# Altium PCB PCB1.PcbDoc
Units mil, origin at the board's own origin, x right, y up, seen from the top; angles counter-clockwise.
Board outline 6000 x 4000 mil, 2 copper layers (Top Layer, Bottom Layer); 7 components, 18 nets, 78 pads, 0 vias.
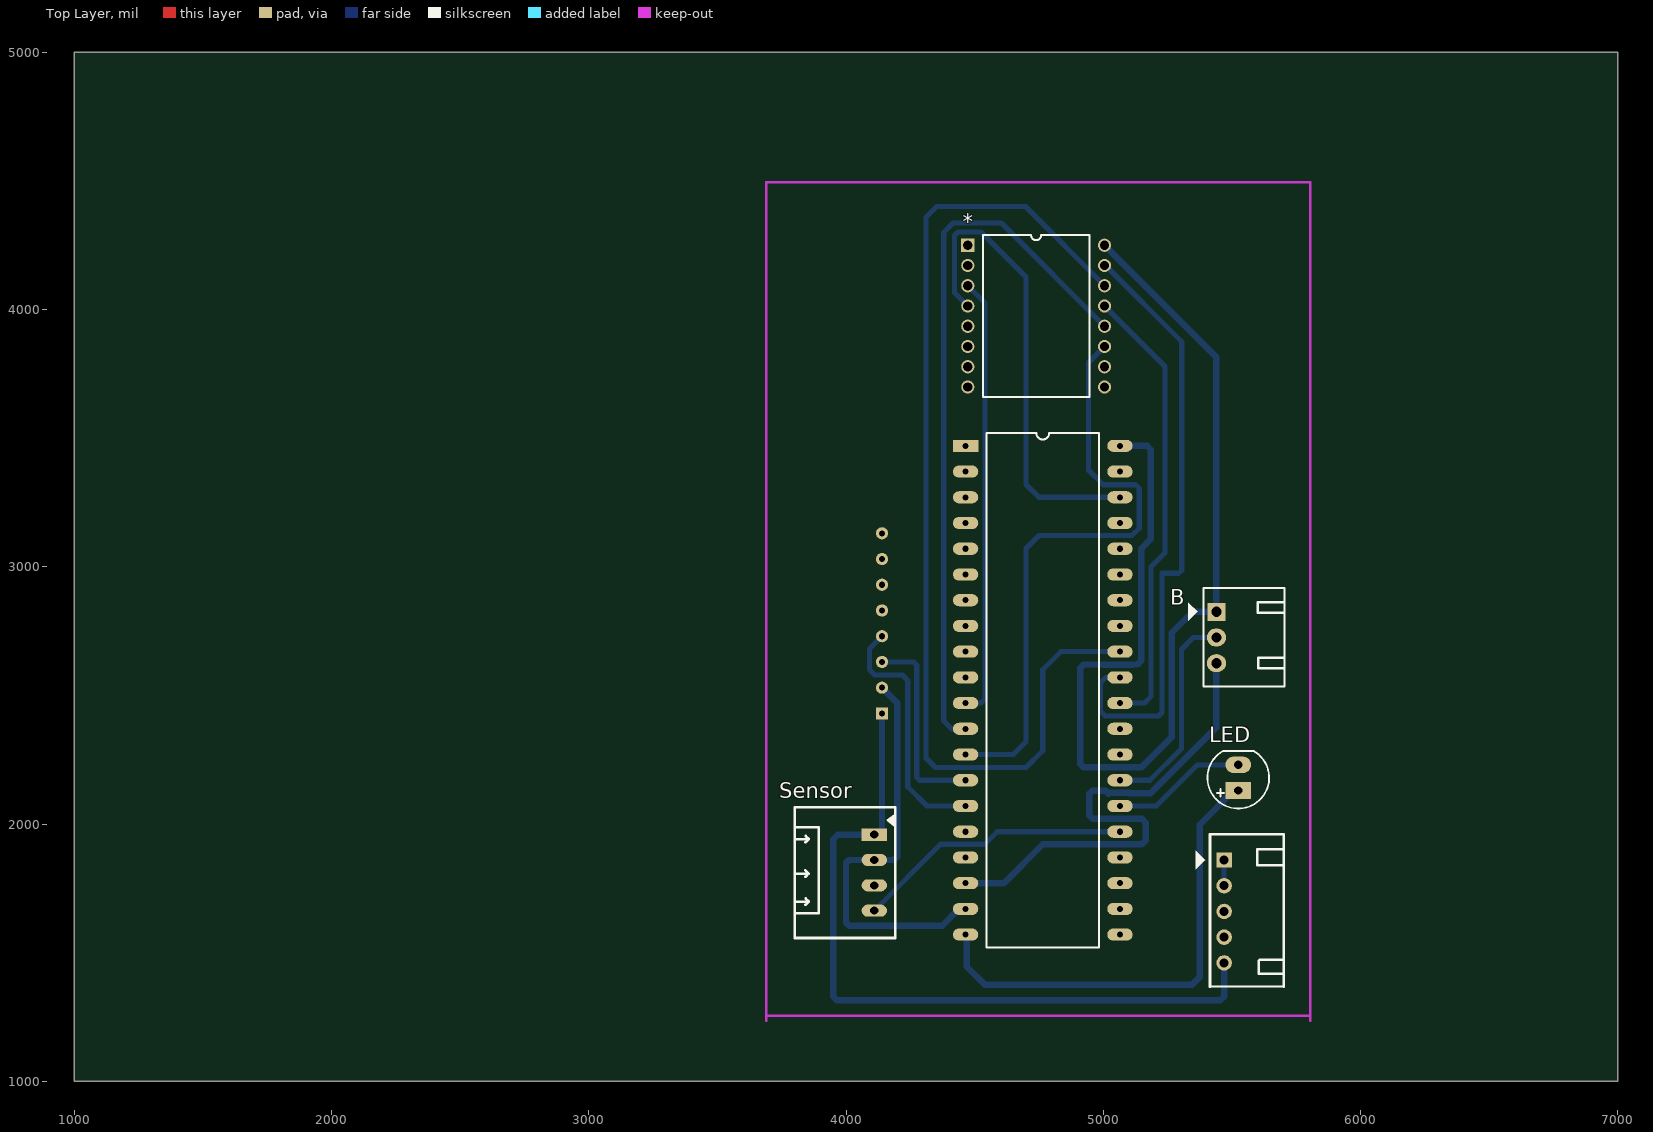
[diagram p0: Top Layer view]
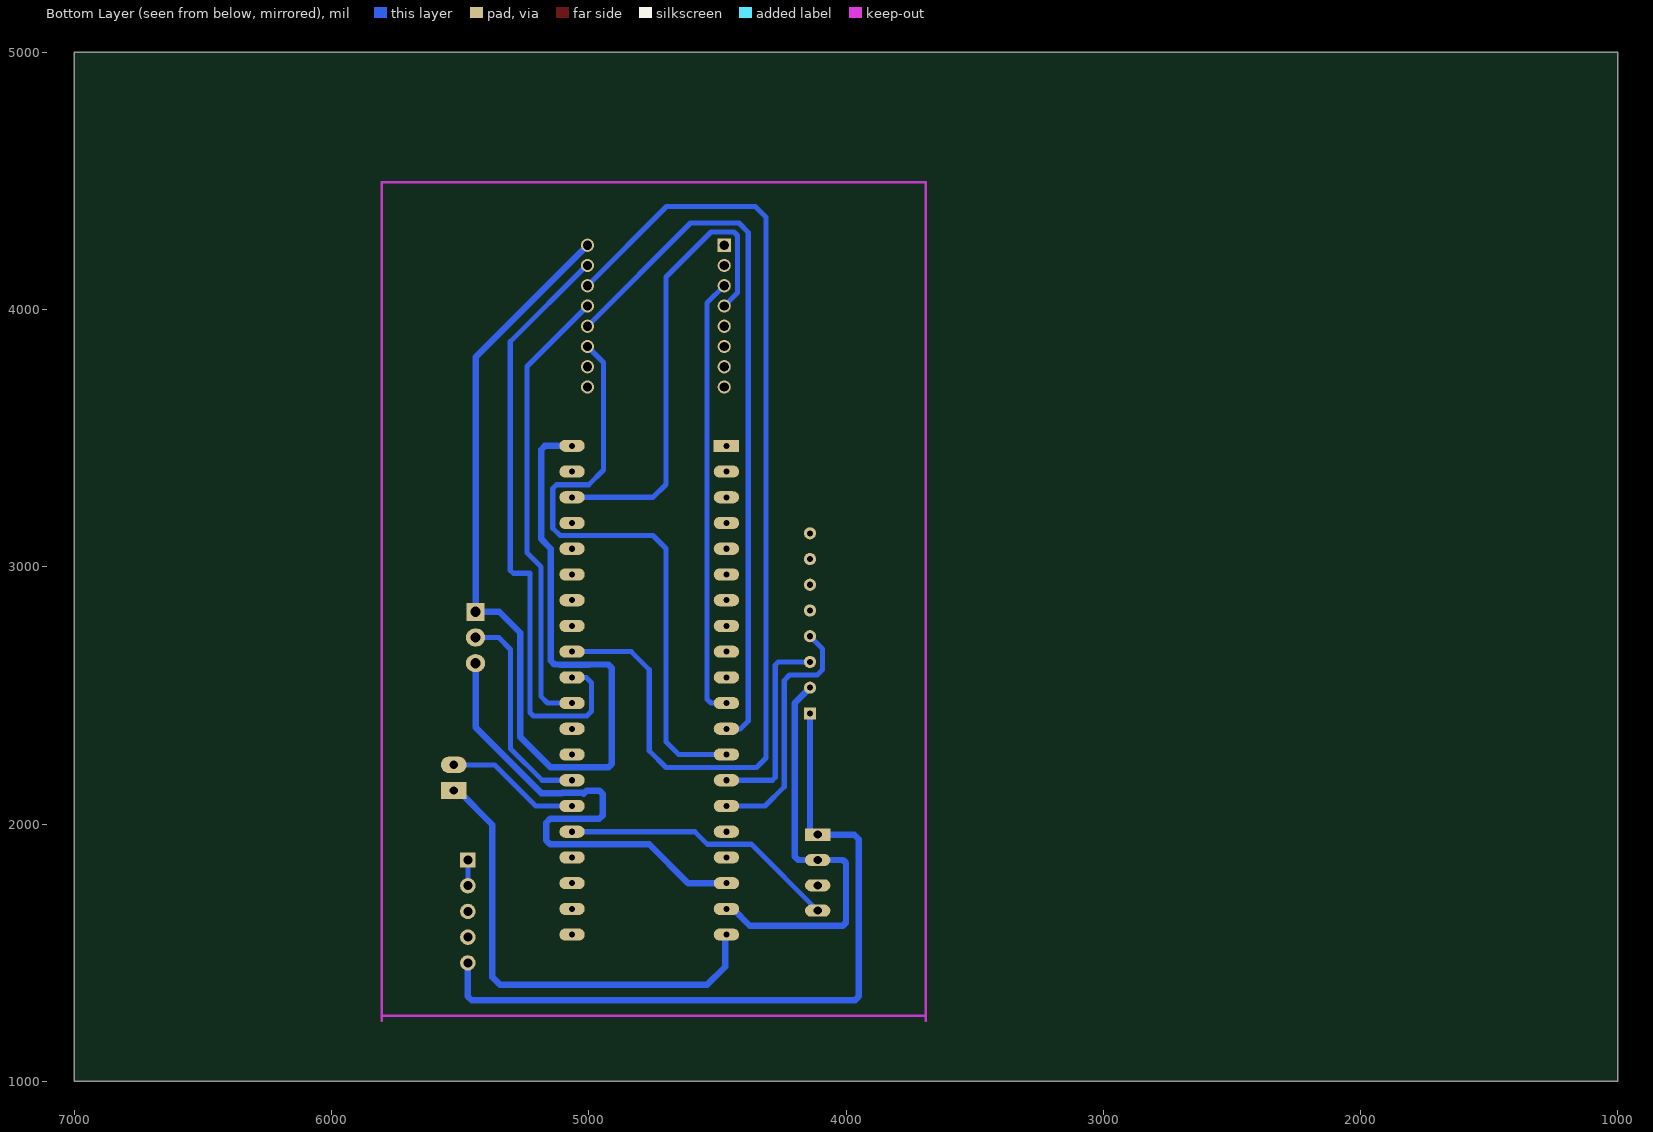
[diagram p1: Bottom Layer view, seen from below]
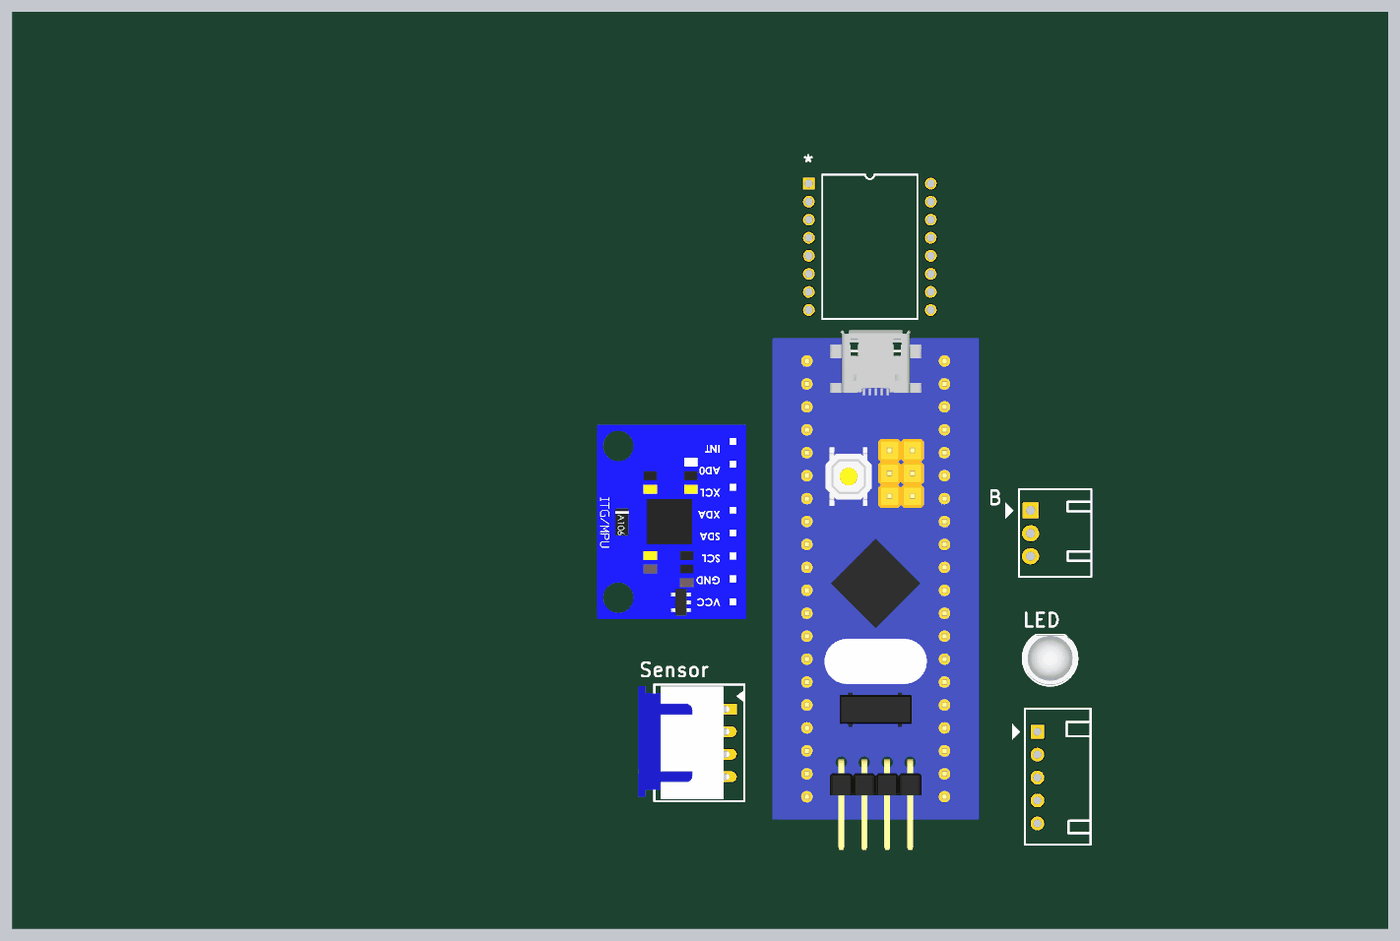
[diagram p2: 3D render of the assembled board from above, using the file's embedded part models]

## Layer stack, top to bottom
Top Solder: solder mask 0.4, Solder Resist, Dk 3.5
Top Layer: signal copper 1.4
Dielectric 1: dielectric 12.6, FR-4, Dk 4.8
Bottom Layer: signal copper 1.4
Bottom Solder: solder mask 0.4, Solder Resist, Dk 3.5

## Board outline
1000,1000 7000,1000 7000,5000 1000,5000

## Design rules (kind name [scope] priority, off if disabled: settings)
Clearance [All] p1: gap=15 ignorepadtopadclearanceinfootprint=FALSE
PolygonConnect [All] p1: connectstyle=Relief reliefconductorwidth=10 reliefentries=4 polygonreliefangle="90 Angle" airgapwidth=10
RoutingLayers [All] p1: top layer_v5=FALSE bottom layer_v5=TRUE
RoutingVias [All] p1: holewidth=28 width=35 viastyle="Through Hole" minholewidth=28 minwidth=30 maxholewidth=28 maxwidth=50
SolderMaskExpansion [All] p1: expansion=4 istentingtop=FALSE
Width [All] p1: maxlimit=50 minlimit=10 preferedwidth=20 toplayer_prefwidth=10 minimp=50.000000 maximp=50.000000 favimp=50.000000
29 further rules are at their usual default settings.

## Components (designator, comment, footprint, x,y, rotation, side; value= is the part's Value field where it differs from the comment)
* "Component_1" "DIP16 - duplicate" 4473.5,4249.96 r0 top
B "Buzzer" "Header 3P DC 2.54" 5440,2825 r0 top
LED "LED 5mm" LED-5MM-RED 5525,2130 r90 top
Sensor "MQ-2" CON4_100_S4B-XH-A_TH_RA 4110,1810.79 r0 top
? "MOD MPU_6050" "MOD MPU-6050" 4140,2430 r90 top
? "KIT STM32F103C8T6" "STM32F103 KIT" 4465,3470 r0 top
? "Header 5P 2.54 Duc Cong" "Header 5P DC 2.54" 5470,1860 r0 top

## Footprints (in the part's own frame and the unit in brackets; to place one, negate y for a bottom-side part, rotate by r counter-clockwise, add the part's x,y. Pads: shape width x height; smd on the part's side, far side on the other; paste and mask are expansions set on the pad)
CON4_100_S4B-XH-A_TH_RA [mm] "Connector Header"
  rect 2.5x1.2 hole 0.8: 1(0,3.75)
  oval 2.5x1.2 hole 0.8: 2(0,1.25) 3(0,-1.25) 4(0,-3.75)
  silkscreen extent -7.87,-6.45 2.08,6.48, body extent -9.64,-6.25 0.44,6.31, height 5.91
"DIP16 - duplicate" [mm]
  rect 1.3x1.3 hole 0.9: 1(0,0)
  round 1.3 hole 0.9: 2(0,-2) 3(0,-4) 4(0,-6) 5(0,-8) 6(0,-10) 7(0,-12) 8(0,-14) 9(13.5,-14) 10(13.5,-12) 11(13.5,-10) 12(13.5,-8) 13(13.5,-6) 14(13.5,-4) 15(13.5,-2) 16(13.5,0)
  silkscreen extent 1.48,-15 12.02,1
"Header 3P DC 2.54" [mil]
  rect 70x70 hole 39.37 unplated: 1(0,0)
  oval 75x70 hole 39.37 unplated: 2(0,-100) 3(0,-200)
  silkscreen extent -110,-290 265,93
"Header 5P DC 2.54" [mil]
  rect 60x60 hole 35: 1(0,0)
  round 60 hole 35: 2(0,-100) 3(0,-200) 4(0,-300) 5(0,-400)
  silkscreen extent -110,-492 232,100
LED-5MM-RED [mil] "LED 2 PIN, 5 ly , Only colour,pin to pin 100mil"
  rect 65x100 hole 32: 1(0,0)
  oval 65x100 hole 32: 2(100,0)
  silkscreen extent -70,-120 154,120, body extent -65,-119 149,118, height 339
"MOD MPU-6050" [mm]
  rect 1.2x1.2 hole 0.6: 0(0,0)
  round 1.2 hole 0.6: 1(2.54,0) 2(5.08,0) 3(7.62,0) 4(10.16,0) 5(12.7,0) 6(15.24,0) 7(17.78,0)
  body extent -1.99,-1.52 19.51,14.98, height 11.03
"STM32F103 KIT" [mm]
  rect 2.5x1.2 hole 0.6: 1(0,0)
  oval 2.5x1.2 hole 0.6: 2(0,-2.54) 3(0,-5.08) 4(0,-7.62) 5(0,-10.16) 6(0,-12.7) 7(0,-15.24) 8(0,-17.78) 9(0,-20.32) 10(0,-22.86) 11(0,-25.4) 12(0,-27.94) 13(0,-30.48) 14(0,-33.02) 15(0,-35.56) 16(0,-38.1) 17(0,-40.64) 18(0,-43.18) 19(0,-45.72) 20(0,-48.26) 21(15.24,-48.26) 22(15.24,-45.72) 23(15.24,-43.18) 24(15.24,-40.64) 25(15.24,-38.1) 26(15.24,-35.56) 27(15.24,-33.02) 28(15.24,-30.48) 29(15.24,-27.94) 30(15.24,-25.4) 31(15.24,-22.86) 32(15.24,-20.32) 33(15.24,-17.78) 34(15.24,-15.24) 35(15.24,-12.7) 36(15.24,-10.16) 37(15.24,-7.62) 38(15.24,-5.08) 39(15.24,-2.54) 40(15.24,0)
  silkscreen extent 2.08,-49.53 13.16,1.27, body extent -3.81,-53.97 19.05,3.59, height 16.12

## Part data
B: library part "Header 3P 2.54 Duc Cong", "Cắm", Chung_Loai=Cắm, Don_Vi=Con, Ma_Hang=MH001302, Ten_Linh_Kien="Header 3P XH2.54-3P Đực Cong"
LED: library part "LED 5mm Do", "Cắm", Chung_Loai=Cắm, Don_Vi=Con, Ma_Hang=MH008967, Ten_Linh_Kien="Led 5MM Phủ Đỏ (1000c)"
Sensor: library part CON-PLG_4X1-100-RA-TH, "4 Pins, 1 Row 2.54mm Pitch, right angle Connector, male", Alternate Part Number-1=NA, Case/Package=TH-CON, Crimp Part Number=ASXHSXH22K51, Manufacturer="Wurth Electronics", Manufacturer Part Number=S4B-XH-A-1(LF)(SN), Mating Part Number=XHP-4, Supplier Part Number-1=S4B-XH-A, Supplier-1=LCSC
?: library part "STM32f103 Bluepill", "KIT STM32F103C8T6 Bluepill"
?: "Cắm", Chung_Loai=Cắm, Don_Vi=Con, Ma_Hang=MH001308, Ten_Linh_Kien="Header 5P XH2.54-5P Đực Cong"

## Nets (pads, with @x,y where several pads share a name; then routed paths per layer and width w, separated by ;. In a path a pad name is that pad's centre, name@x,y a point inside that pad or via, vN(x,y) a via of type N, cw(c..) or ccw(c..) an arc to the next point about the centre after c; other vN are vias at no path point)
GND: ?.1@4140,2530 ?.19 Sensor.2 | length 1619.3
  Bottom Layer w20: 4185,1860 4189,1864 ; ?.19@4439.41,1670 ?.19
  Bottom Layer w25: ?.1@4140,2530 4200,2470 4200,1875 4189,1864 ; 4185,1860 Sensor.2 4011.72,1860 4000,1848.28 4000,1616.72 4011.72,1605 4374.41,1605 ?.19@4439.41,1670
Net*_3: *.3 ?.11 | length 1716.2
  Bottom Layer w20: ?.11 4525,2470 4540,2485 4540,4025.98 *.3
Net*_4: *.4 ?.38 | length 1842.9
  Bottom Layer w20: *.4 4422,4065.24 4422,4287.5 4435.5,4301 4525,4301 4700,4126 4700,3320 4750,3270 ?.38
Net*_11: *.11 ?.13 | length 2366.2
  Bottom Layer w20: ?.13 4650,2270 4700,2320 4700,3071 4750,3121 5111,3121 5140,3150 5140,3304 5125,3319 5000,3319 4943,3376 4943,3794.26 *.11
Net*_12: *.12 ?.12 | length 2803.4
  Bottom Layer w20: ?.12 4410,2370 4380,2400 4380,4300 4416,4336 4604,4336 *.12
Net*_13: *.13 ?.30 | length 1769.2
  Bottom Layer w20: *.13 5240,3778.74 5240,3054.5 5185,2999.5 5185,2495 5160,2470 ?.30
Net*_14: *.14 ?.32 | length 4079.6
  Bottom Layer w20: *.14 4697.48,4400 4353,4400 4311.5,4358.5 4311.5,2256.5 4348,2220 4700,2220 4765,2285 4765,2600 4835,2670 ?.32
Net*_15: *.15 ?.31 | length 2381.3
  Bottom Layer w20: *.15 5008.78,4171.22 5305,3875 5305,2986.72 5293.28,2975 5228,2975 5228,2433 5215,2420 5007.5,2420 4990,2437.5 4990,2550 5010,2570 ?.31
Net*_16: *.16 ?.40 B.1 | length 4212.8
  Bottom Layer w25: *.16 5440,3814.96 B.1 5347.5,2825 5266.25,2743.75 5266.25,2338.25 5148,2220 4924.64,2220 4910,2234.64 4910,2605.36 4924.64,2620 4998,2620 4999,2619 5111.89,2619 5112.89,2620 5132.86,2620 5147.5,2634.64 5147.5,3070.5 5185,3108 5185,3455.36 5170.36,3470 ?.40
Net_0: ?.0 ?.5@5470,1460 Sensor.1 | length 2934.3
  Bottom Layer w20: Sensor.1 4126.38,1958.43 Sensor.1@4140,1972.05
  Bottom Layer w25: Sensor.1 3968.07,1958.43 3950,1940.36 3950,1329.64 3964.64,1315 5455.36,1315 5470,1329.64 ?.5@5470,1460 ; Sensor.1@4140,1972.05 ?.0
Net_1: ?.1@5470,1860 ?.2@5470,1760 | length 100
  Bottom Layer w20: ?.2@5470,1760 ?.1@5470,1860
Net_2: ?.2@4140,2630 ?.14 | length 771.3
  Bottom Layer w20: ?.2@4140,2630 4263.28,2630 4275,2618.28 4275,2181.72 4286.72,2170 ?.14
Net_3: ?.3@4140,2730 ?.15 | length 985.9
  Bottom Layer w20: ?.3@4140,2730 4091,2681 4091,2600 4112,2579 4219.28,2579 4240,2558.28 4240,2145 4315,2070 ?.15
Net_18: ?.18 B.3 | length 2012.2
  Bottom Layer w20: 5103.07,2121.38 5105.57,2118.88
  Bottom Layer w25: ?.18 4614,1770 4765.38,1921.38 5150.36,1921.38 5165,1936.02 5165,2005.36 5150.36,2020 4959.64,2020 4945,2034.64 4945,2115.36 4959.64,2130 5007.11,2130 5017.11,2120 ; 5018.88,2118.23 5022.03,2121.38 5103.07,2121.38 ; 5105.57,2118.88 5106.69,2120 5184,2120 5440,2376 B.3
Net_20: ?.20 LED.1 | length 1880.9
  Bottom Layer w20: ?.20 ?.20@4470,1575
  Bottom Layer w25: ?.20@4470,1575 4470,1445 4540,1375 5345,1375 5375,1405 5375,1997.5 5507.5,2130 LED.1
Net_25: ?.25 Sensor.4 | length 1082.1
  Bottom Layer w20: Sensor.4 4367.85,1921 4539,1921 4588,1970 ?.25
Net_26: ?.26 LED.2 | length 526.3
  Bottom Layer w20: ?.26 5206,2070 5366,2230 LED.2
Net_27: ?.27 B.2 | length 831
  Bottom Layer w20: ?.27 5180.97,2170 5303.75,2292.78 5303.75,2678.75 5350,2725 B.2
pads on no net: *.1 *.2 *.5 *.6 *.7 *.8 *.9 *.10 ?.1@4465,3470 ?.2@4465,3370 ?.3@4465,3270 ?.3@5470,1660 ?.4 ?.5@4140,2930 ?.5@4465,3070 ?.6 ?.7 ?.8 ?.9 ?.10 ?.16 ?.17 ?.21 ?.22 ?.23 ?.24 ?.28 ?.29 ?.33 ?.34 ?.35 ?.36 ?.37 ?.39 Sensor.3

## Keep-outs
Keep-Out Layer:
  lines w10: 3690,1235 3690,4325 3690,4495 5805,4495 5805,4325 5805,1235 ; 3690,1255 5805,1255